# EAGLE board sensor-tiny2313a (EAGLE 6.4)
BN: st23; BR: rev0a
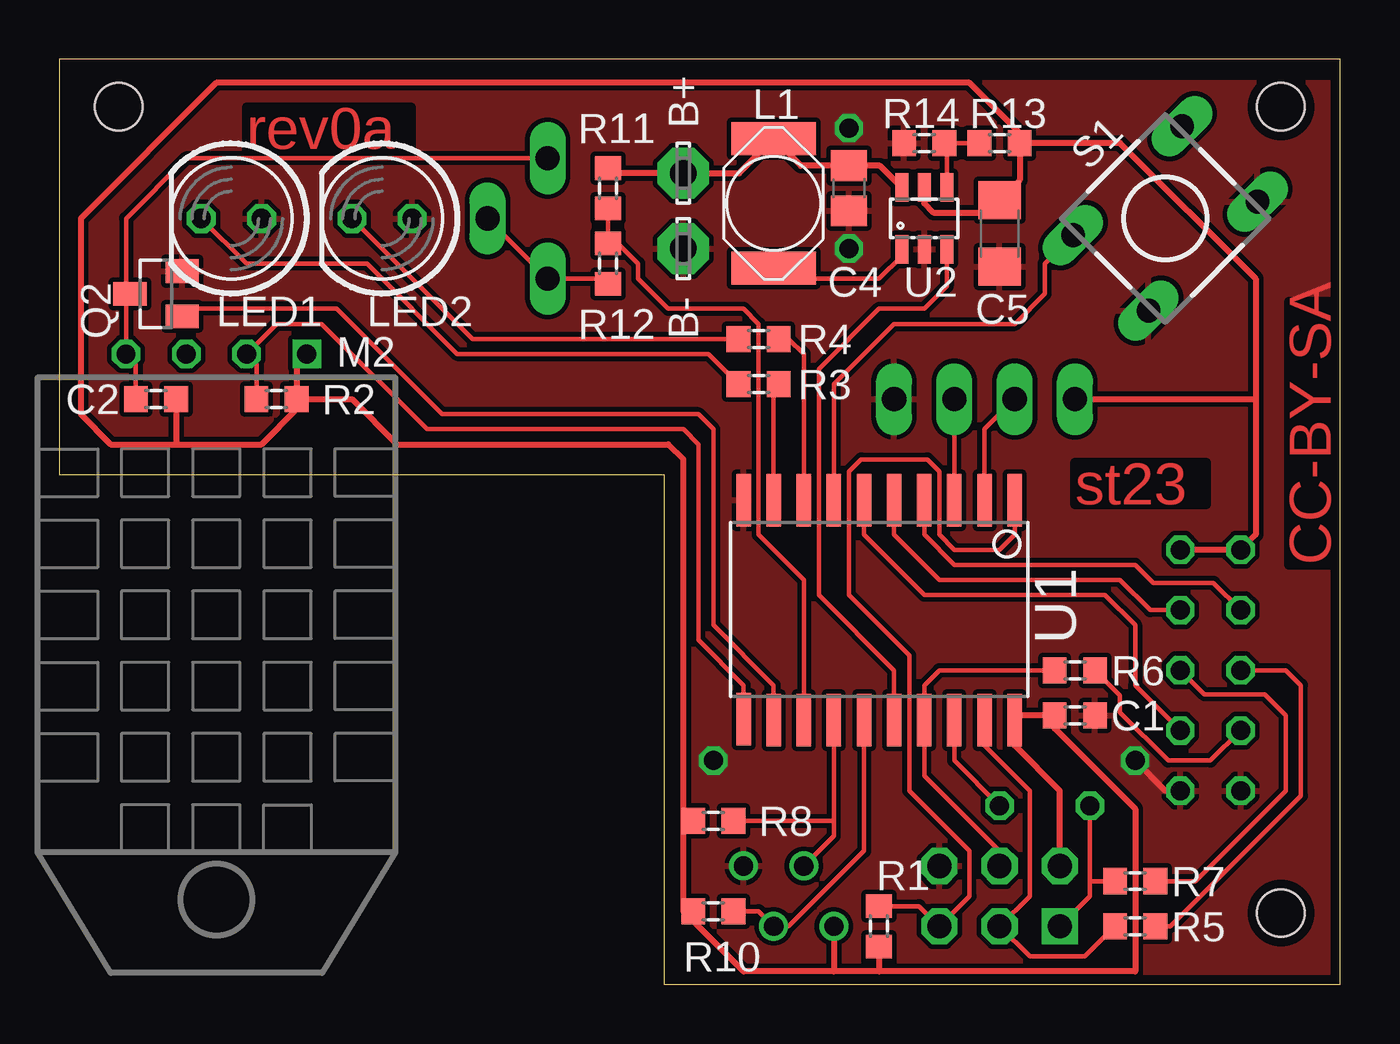
[diagram p0: board, top side]
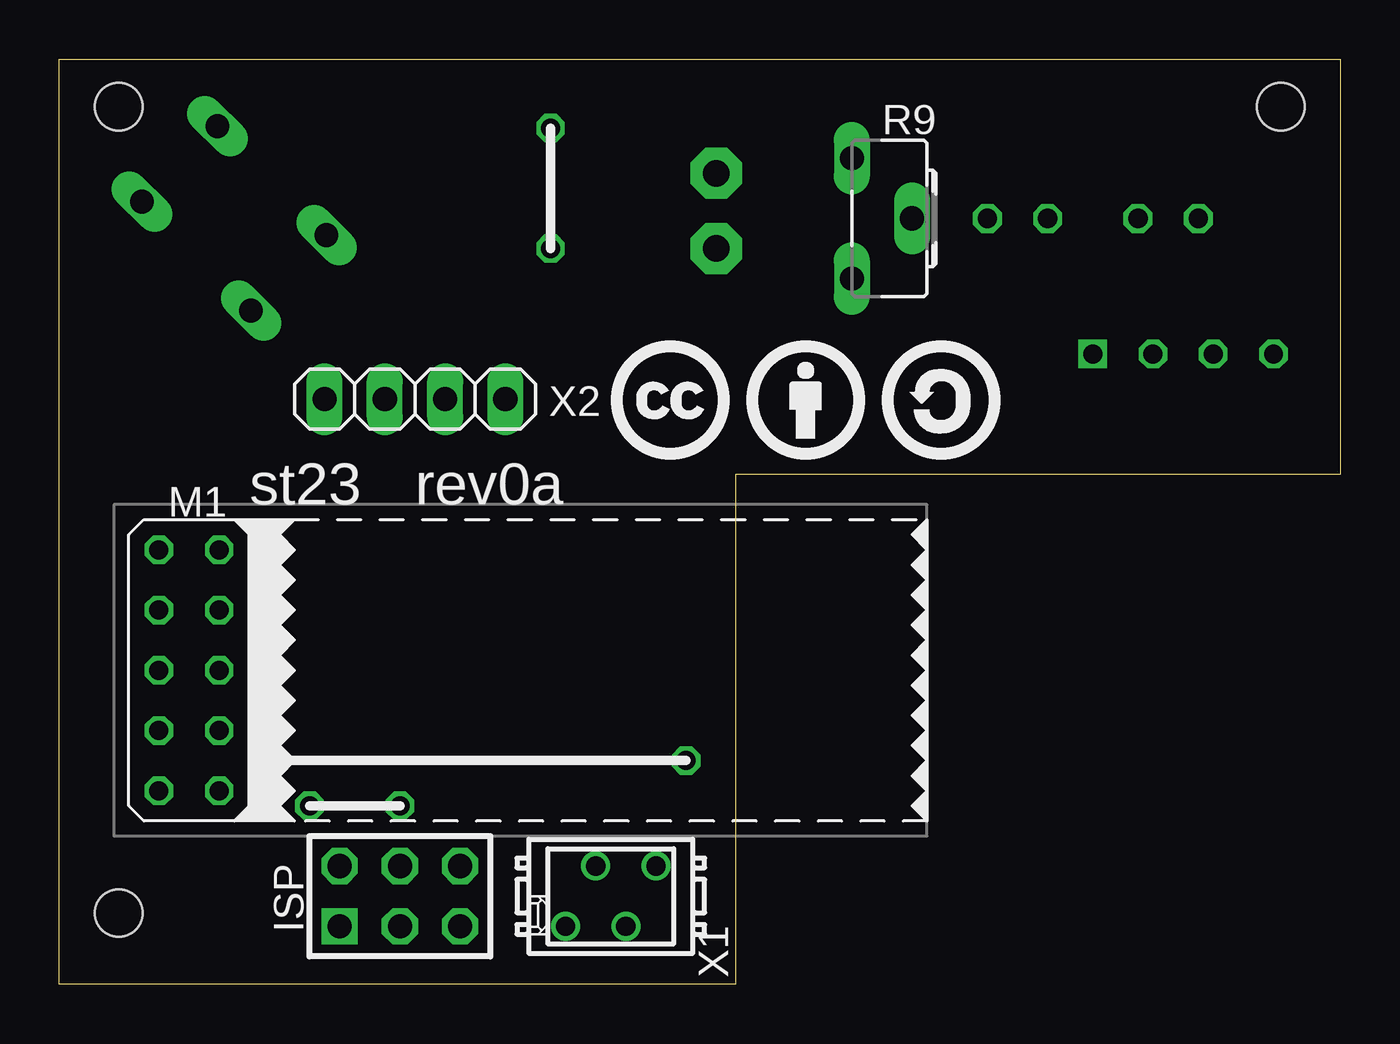
[diagram p1: board, bottom side, seen from below]

Size 54 x 39 mm. Coordinates in mm from the lower left corner, seen from the top.
Outline: 25.5,0 54,0 54,39 0,39 0,21.5 25.5,21.5 25.5,0
Copper layers (1*16): Top 0.035mm / dielectric 1.5mm / Bottom 0.035mm
Design rules "pcb-devboards_Standard *": minimum track width 0.2mm, minimum drill 0.4mm, track to track 0.2mm, track to pad 0.2mm, pad to pad 0.2mm, via to via 0.2mm, smd to smd 0.2mm, copper to edge 0.4mm, drill to drill 0.2mm, minimum pad ring 0.2mm, minimum via ring 0.2mm, stop-mask expansion 0.1mm, vias tented up to drill 0mil, thermal gap 0.2mm
Net classes: 0 default: width 0.2 mm, drill 0.8 mm; 1 pwr: width 0.25 mm, drill 0.8 mm
Holes 2 mm at 51.5,3 51.5,37 2.5,37
bKeepout: area 23.5,23.5 to 30.8,30.5; area 25.5,30 to 28.5,36

## Footprints (pad centres in the part's own frame; a part is rotated, then mirrored left to right if it is on the bottom)
LSP11 = drill 1.118 pad 2.159 octagon: MP 0,0
C0603 = smd 1 x 1.1: 1 -0.85,0; 2 0.85,0
C0805 = smd 1.3 x 1.5: 1 -0.95,0; 2 0.95,0
C1206 = smd 1.6 x 1.8: 1 -1.4,0; 2 1.4,0
AVR-ISP-6 = drill 1.016 square: 1 -2.54,-1.27 | drill 1.016 octagon: 2 -2.54,1.27; 3 0,-1.27; 4 0,1.27; 5 2.54,-1.27; 6 2.54,1.27
PISG = smd 1.4 x 3.56: 1 -2.73,0; 2 2.73,0
LED5MM = drill 0.813 octagon: A -1.27,0; K 1.27,0
NRF24L01P-A = drill 0.8 octagon: CE -2.54,-1.27; CSN -2.54,1.27; GND_A 5.08,1.27; GND_B 5.08,-1.27; IRQ 2.54,1.27; MISO 2.54,-1.27; MOSI 0,1.27; SCK 0,-1.27; VCC_A -5.08,1.27; VCC_B -5.08,-1.27
DHT22-NOPRINT = drill 0.8 square: 1 -3.81,0 | drill 0.8 octagon: 2 -1.27,0; 3 1.27,0; 4 3.81,0
MICRO3 = smd 1 x 1.4: 1 -0.95,-1.1; 2 0.95,-1.1; 3 0,1.1
R0603 = smd 1 x 1.1: 1 -0.85,0; 2 0.85,0
CA6H = drill 1.016 long: A -2.54,0; E 2.54,0; S 0,2.54
DTS-6 = drill 1 long: 1 -3.25,2.25; 2 3.25,2.25; 3 -3.25,-2.25; 4 3.25,-2.25
SO20L$ = smd 0.61 x 2.21: 1 -5.715,-4.636; 2 -4.445,-4.636; 3 -3.175,-4.636; 4 -1.905,-4.636; 5 -0.635,-4.636; 6 0.635,-4.636; 7 1.905,-4.636; 8 3.175,-4.636; 9 4.445,-4.636; 10 5.715,-4.636; 11 5.715,4.61; 12 4.445,4.636; 13 3.175,4.636; 14 1.905,4.636; 15 0.635,4.636; 16 -0.635,4.636; 17 -1.905,4.636; 18 -3.175,4.636; 19 -4.445,4.636; 20 -5.715,4.636
SOT23-6 = smd 0.55 x 1.2: 1 -0.95,-1.3; 2 0,-1.3; 3 0.95,-1.3; 4 0.95,1.3; 5 0,1.3; 6 -0.95,1.3
MICROMATCH-4 = drill 0.813: 1 1.905,1.27; 2 0.635,-1.27; 3 -0.635,1.27; 4 -1.905,-1.27
1X04 = drill 1.016 long: 1 -3.81,0; 2 -1.27,0; 3 1.27,0; 4 3.81,0

## Placement (x,y rotation side)
B+  LSP11  [LSP11]  26.3,34.2 90 top
B-  LSP11  [LSP11]  26.3,31.02 90 top
C1  100n  [C0603]  42.81,11.34 0 top
C2  100n  [C0603]  4.08,24.67 0 top
C4  4u7  [C0805]  33.29,33.56 270 top
C5  22u  [C1206]  39.64,31.66 270 top
ISP  ML6  [AVR-ISP-6]  39.64,3.71 0 bottom
L1  4u7  [PISG]  30.11,32.92 90 top
LED1  GR LC  [LED5MM]  7.26,32.29 180 top
LED2  RT LC  [LED5MM]  13.61,32.29 180 top
M1  NRF24L01P-M  [NRF24L01P-A]  48.53,13.24 270 bottom
M2  DHT22-NP  [DHT22-NOPRINT]  6.62,26.57 180 top
Q2  IRLML2502  [MICRO3]  4.08,29.11 90 top
R1  10k  [R0603]  34.56,2.45 90 top
R2  10k  [R0603]  9.16,24.67 180 top
R3  470  [R0603]  29.48,25.3 180 top
R4  510  [R0603]  29.48,27.21 180 top
R5  4k7  [R0603]  45.35,2.45 0 top
R6  4k7  [R0603]  42.81,13.24 0 top
R7  4k7  [R0603]  45.35,4.35 180 top
R8  4k7  [R0603]  27.57,6.89 0 top
R9  2k5  [CA6H]  20.59,32.29 270 bottom
R10  4k7  [R0603]  27.57,3.08 0 top
R11  10k  [R0603]  23.13,33.56 270 top
R12  12k  [R0603]  23.13,30.38 270 top
R13  470k  [R0603]  39.64,35.47 180 top
R14  270k  [R0603]  36.47,35.47 0 top
S1  DTS-6  [DTS-6]  46.62,32.29 45 top
U1  TINY2313-*S*  [SO20L$]  34.56,15.78 180 top
U2  MCP1640C  [SOT23-6]  36.47,32.29 0 top
U$1  CC-TPLACE-HALF  [CC_TPLACE_HS]  30.75,22.13 0 bottom
U$2  SP6029TOP  [SP6029T]  -1,-2 0 top
U$3  BY-TPLACE-HS  [BY_TPLACE_HS]  25.04,22.13 0 bottom
U$4  SA-TPLACE-HALF  [SA_TPLACE_HS]  19.32,22.13 0 bottom
X1  I2C  [MICROMATCH-4]  30.75,3.71 180 bottom
X2  serial  [1X04]  39.01,24.67 0 bottom

## Library data of the parts
B+ B- = solpad
C1 C2 R1-R8 R10-R14 = rcl
C4 = rcl; _REICHELT_: X7R-G0805 4,7/16
C5 = rcl; _REICHELT_: X7R-G1206 22/10
ISP U1 = avr-7
L1 = inductor-Fastron; _REICHELT_: L-PISG 4,7µ
LED1 = led; I: 2.2mA; U_F: 2V2
LED2 = led; I: 2mA; U_F: 2V
M1 M2 = modules
Q2 = mosfet
R9 = pot
S1 = switch-tact
U2 = karlnet-parts
U$1 U$3 U$4 = creative-commons
U$2 = strapubox
X1 = con-amp-micromatch
X2 = pinhead-mod

## Nets
!RESET: ISP.5 R1.2 U1.1
AIN1: R11.2 R12.1 U1.13
DHTON: Q2.1 U1.12
DI: ISP.4 R6.1 U1.17
DO: ISP.1 R7.2 U1.18
GND [pwr]: B-.MP C1.2 C4.2 C5.2 ISP.6 LED1.A LED2.A M1.GND_A M1.GND_B Q2.2 R14.1 S1.3 S1.4 U1.10 U2.2 X1.4 X2.4
ICP1: M2.2 R2.2 U1.11
LED1: R3.1 U1.9
LED2: R4.1 U1.8
N$1: LED2.K R4.2
N$2: C2.1 M2.4 Q2.3 R9.A
N$3: LED1.K R3.2
N$7: R9.E R9.S R12.2
N$8: L1.1 U2.1
N$9: R13.2 R14.2 U2.4
PWRON: U1.16 U2.3
RDI: M1.MISO R6.2
RDO: M1.MOSI R7.1
RFCE: M1.CE U1.4
RFCSN: M1.CSN U1.5
RFIRQ: M1.IRQ U1.6
RSCK: M1.SCK R5.2
RXD: U1.2 X2.2
SCK: ISP.3 R5.1 U1.19
SCL: R10.2 U1.15 X1.3
SDA: R8.2 U1.14 X1.2
SW1: S1.1 U1.7
TXD: U1.3 X2.3
VBAT [pwr]: B+.MP C4.1 L1.2 R11.1 U2.6
VCC [pwr]: C1.1 C2.2 C5.1 ISP.2 M1.VCC_A M1.VCC_B M2.1 R1.1 R2.1 R8.1 R10.1 R13.1 U1.20 U2.5 X1.1 X2.1

## Tracks (layer width: path | path; a pad name or v marks a point on that pad's centre or on a via)
!RESET
  Top 0.2: U1.1 40.27,18.95 39.64,18.32 37.73,18.32 37.1,18.95 37.1,21.62 36.59,22.13 33.8,22.13 33.29,21.62 33.29,16.41 35.83,13.88 35.83,8.16 38.37,5.62 38.37,3.71 ISP.5 36.25,3.29 R1.2
AIN1
  Top 0.2: R11.2 R12.1 23.55,31.23 24.4,30.38 24.4,29.75 25.67,28.48 28.84,28.48 29.48,27.84 29.48,18.95 31.38,17.05 U1.13
DHTON
  Top 0.2: U1.12 30.11,12.61 27.57,15.14 27.57,23.4 26.94,24.04 16.14,24.04 11.7,28.48 5.5,28.48 Q2.1
DI
  Top 0.2: R6.1 37.1,13.24 36.47,12.61 U1.17 36.47,8.79 39.64,5.62 ISP.4
DO  (via drill 0.8)
  Top 0.2: ISP.1 43.45,3.71 43.45,4.35 | 43.45,4.35 v43.45,7.53 | v39.64,7.53 37.73,9.43 U1.18 | R7.2 43.45,4.35
  Bottom 0.2: v43.45,7.53 v39.64,7.53
GND  (via drill 0.8)
  Top 0.25: M1.GND_A 46.62,8.16 v45.35,9.43
  Bottom 0.25: v33.29,36.1 v33.29,31.02 | v45.35,9.43 v27.57,9.43
  pour Top: -2.27,38.01 56.15,38.01 56.15,-2 -2.27,-2
ICP1
  Top 0.2: R2.2 8.31,26.16 M2.2 9.16,27.84 11.06,27.84 15.51,23.4 26.3,23.4 26.94,22.77 26.94,14.51 28.84,12.61 28.84,11.34 29.01,11.17 U1.11
LED1
  Top 0.2: U1.9 30.11,25.09 R3.1
LED2
  Top 0.2: U1.8 31.38,26.57 30.75,27.21 R4.1
N$1
  Top 0.2: R4.2 17.41,27.21 LED2.K
N$2
  Top 0.2: M2.4 3.23,26.16 C2.1 3.23,24.25 | M2.4 2.98,26.75 | R9.A 5.35,34.83 2.81,32.29 2.81,29.11 | 2.81,29.11 M2.4 | Q2.3 2.81,29.11
N$3
  Top 0.2: LED1.K 7.89,30.38 12.97,30.38 16.78,26.57 27.36,26.57 R3.2
N$7
  Top 0.2: R9.S R9.E 22.91,29.75 R12.2
N$8
  Top 0.2: U2.1 35.52,30.7 34.56,29.75 30.56,29.75 L1.1
N$9
  Top 0.2: U2.4 37.41,35.37 R14.2 R13.2
PWRON
  Top 0.2: U2.3 37.41,29.43 36.47,28.48 34.56,28.48 32.02,25.94 32.02,16.41 35.2,13.24 U1.16
RDI
  Top 0.2: M1.MISO 48.53,9.43 46.75,9.43 44.72,11.46 44.72,12.19 R6.2
RDO
  Top 0.2: M1.MOSI 48.28,12.22 50.82,12.22 51.7,11.34 51.7,8.16 47.9,4.35 R7.1
RFCE
  Top 0.2: M1.CE 48.66,16.92 46.12,16.92 45.35,17.68 37.73,17.68 36.47,18.95 U1.4
RFCSN
  Top 0.2: M1.CSN 45.99,15.78 44.72,17.05 37.1,17.05 35.2,18.95 U1.5
RFIRQ
  Top 0.2: M1.IRQ 45.35,12.61 45.35,15.14 44.09,16.41 36.47,16.41 33.92,18.95 U1.6
RSCK
  Top 0.2: M1.SCK 51.7,13.24 52.34,12.61 52.34,7.95 46.84,2.45 R5.2
RXD
  Top 0.2: U1.2 39.01,23.4 X2.2
SCK
  Top 0.2: U1.19 39.01,10.06 40.91,8.16 40.91,3.71 ISP.3 40.91,1.17 43.23,1.17 R5.1
SCL
  Top 0.2: U1.15 33.92,5.62 30.75,2.45 X1.3 29.48,3.08 R10.2
SDA
  Top 0.2: X1.2 32.66,6.26 32.66,6.89 | 32.66,6.89 U1.14 | R8.2 32.66,6.89
SW1
  Top 0.2: U1.7 32.66,25.3 35.2,27.84 40.27,27.84 41.55,29.11 41.55,30.39 S1.1
TXD
  Top 0.2: U1.3 X2.3
VBAT
  Top 0.25: U2.6 34.59,34.51 C4.1 31.26,34.51 L1.2 28.66,34.2 B+.MP 23.34,34.2 R11.1
VCC
  Top 0.25: U2.5 36.47,32.92 36.85,32.54 39.13,32.54 C5.1 40.49,33.91 R13.1 | M2.1 10.01,26.16 R2.1 | ISP.2 42.18,8.16 40.27,10.06 U1.20 40.47,11.34 C1.1 41.97,10.79 45.35,7.4 45.35,0.54 34.56,0.54 | M1.VCC_A M1.VCC_B 50.44,18.95 50.44,24.67 | R2.1 12.34,24.67 14.24,22.77 25.67,22.77 26.3,22.13 26.3,6.89 | 4.93,22.77 2.17,22.77 0.91,24.04 0.91,32.29 6.62,38.01 38.37,38.01 40.49,35.88 R13.1 | 4.93,22.77 8.53,22.77 10.01,24.25 R2.1 | 50.44,24.67 50.44,29.75 44.72,35.47 R13.1 | X2.1 50.44,24.67 | 34.56,0.54 32.66,0.54 | 32.66,0.54 28.84,0.54 26.62,2.76 | 40.27,35.47 R13.1 | 26.3,6.89 26.3,3.08 26.62,2.76 | R1.1 34.56,0.54 | X1.1 32.66,0.54 | R10.1 26.73,2.87 26.62,2.76 | C2.2 4.93,22.77 | R8.1 26.3,6.89

## Text on the board
Top: CC-BY-SA